# Altium PCB auton_26.PcbDoc
Units mil, origin at the board's own origin, x right, y up, seen from the top; angles counter-clockwise.
Board outline 4000 x 2000 mil, 2 copper layers (Top Layer, Bottom Layer); 26 components, 23 nets, 76 pads, 3 vias.
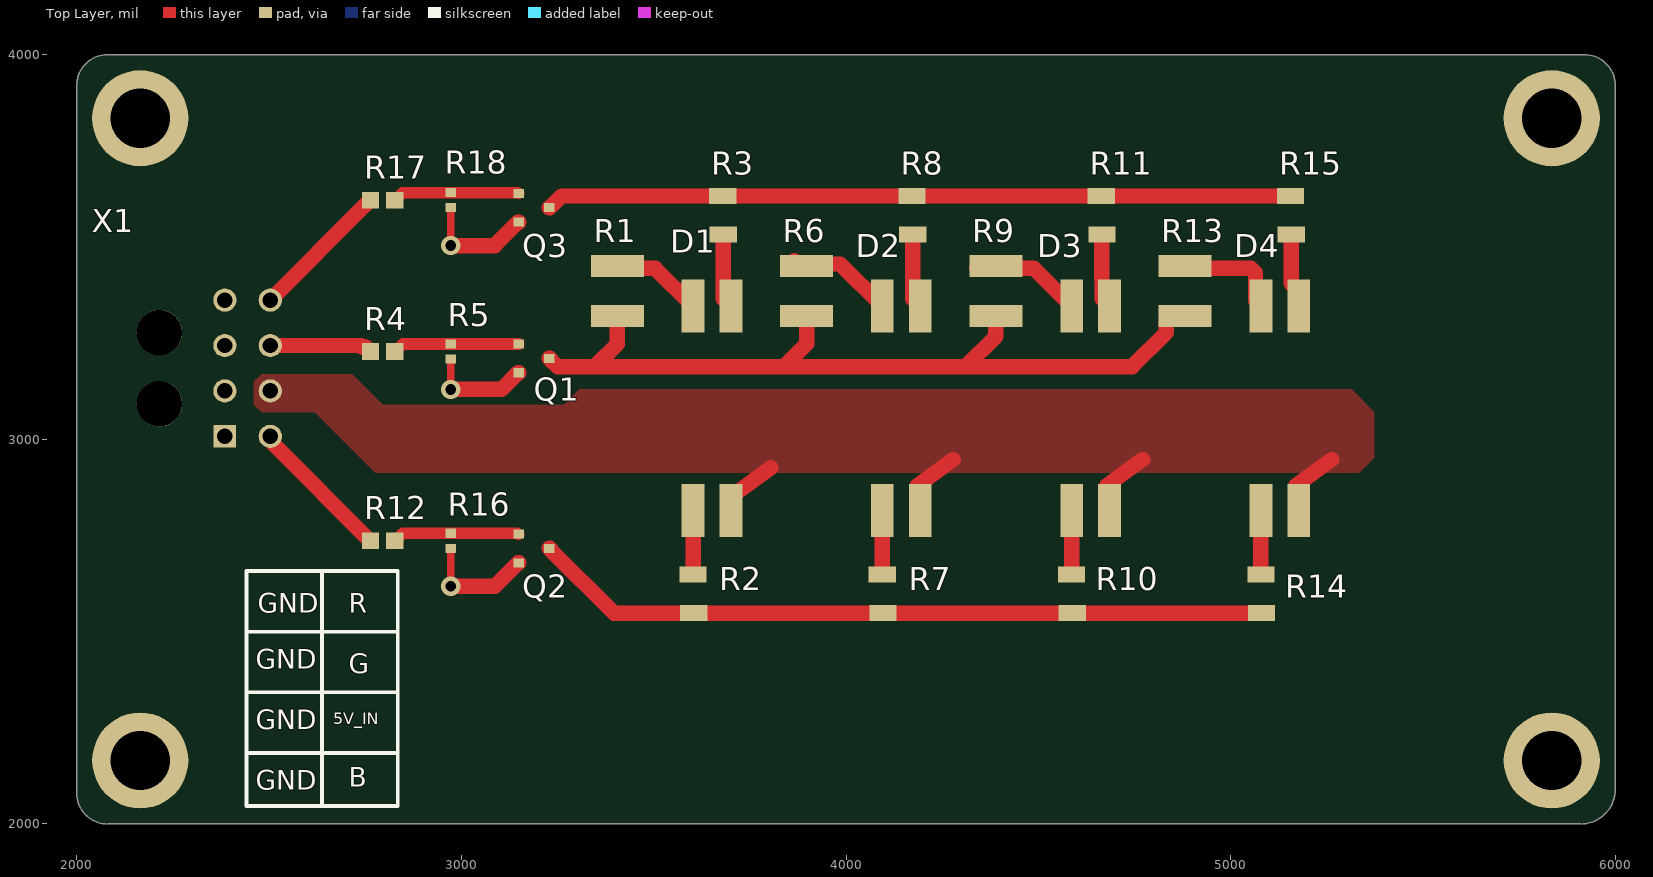
[diagram p0: Top Layer view]
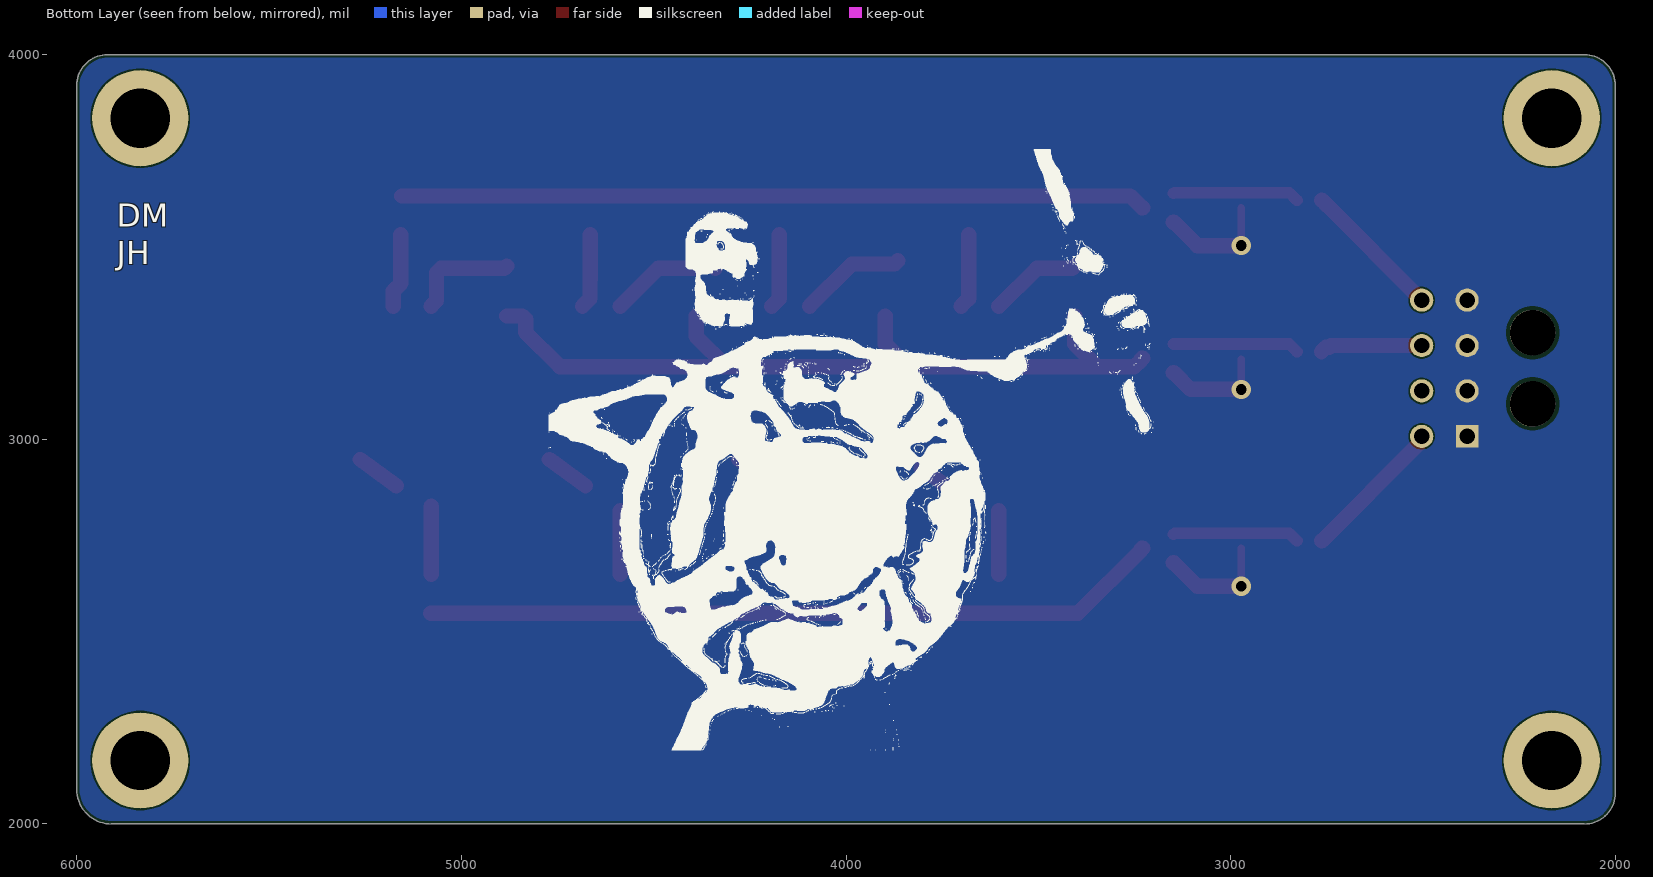
[diagram p1: Bottom Layer view, seen from below]
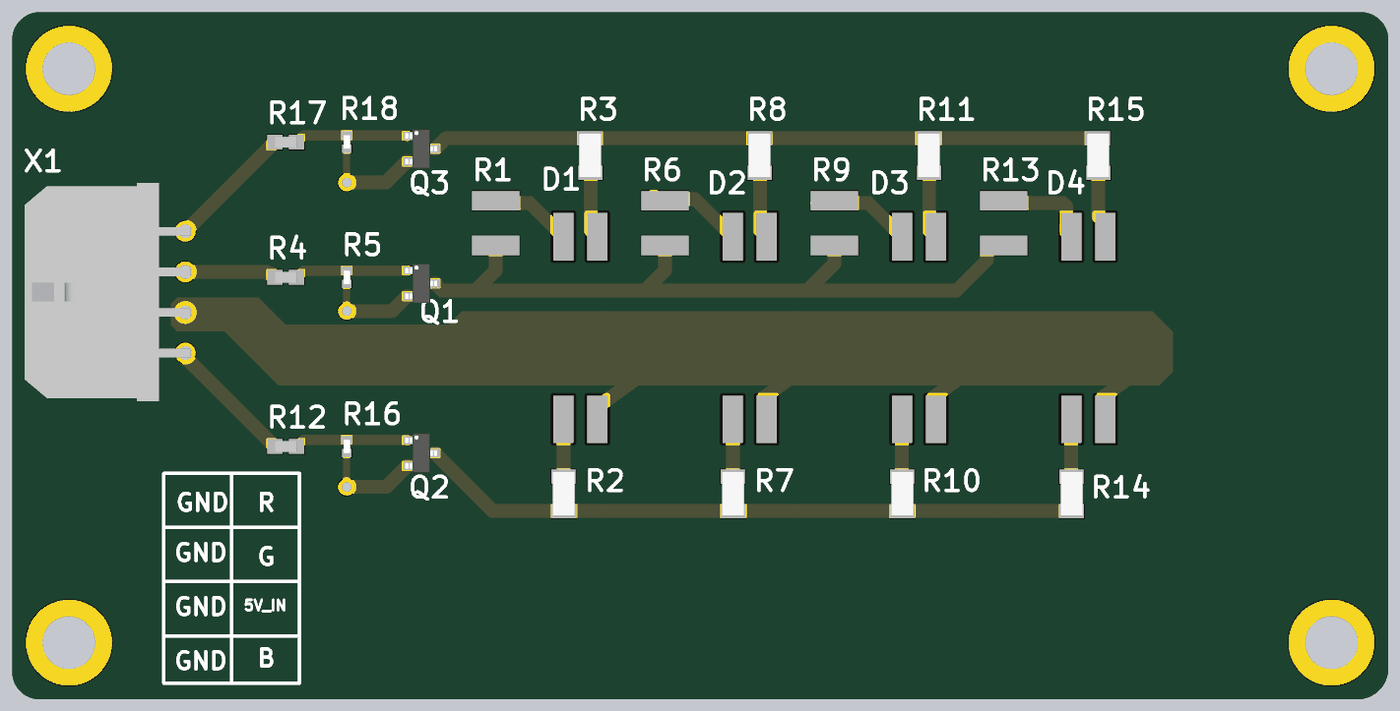
[diagram p2: 3D render of the assembled board from above, using the file's embedded part models]

## Layer stack, top to bottom
Top Solder: solder mask 0.4, Solder Resist, Dk 3.5
Top Layer: signal copper 1.4
Dielectric 1: dielectric 12.6, FR-4, Dk 4.8
Bottom Layer: signal copper 1.4
Bottom Solder: solder mask 0.4, Solder Resist, Dk 3.5

## Board outline
2000,2080.13 2000,3920 cw(c2080,3920) 2080,4000 5920,4000 cw(c5920,3920) 6000,3920 6000,2090 cw(c5910,2090) 5910,2000 2080.13,2000 cw(c2080.13,2080.13)

## Design rules (kind name [scope] priority, off if disabled: settings)
BoardOutlineClearance [All] p1: gap=7.87 ignorepadtopadclearanceinfootprint=FALSE
Clearance Clearance_1 [InNet('No Net') vs InNet('GND')] p1: gap=393.7 ignorepadtopadclearanceinfootprint=FALSE
Clearance "Stitching GND" [IsStitchingVia and InNet('GND') vs (IsVia and (Not IsStitchingVia)) Or IsPad] p2: gap=5 ignorepadtopadclearanceinfootprint=FALSE
Clearance [All] p3: gap=4 ignorepadtopadclearanceinfootprint=FALSE except(5: Arc-Via Track-Via SMDPad-Via THPad-Via Via-Via Via-Fill Via-Poly Via-Region Via-Text; 9.84: Arc-Hole Track-Hole SMDPad-Hole THPad-Hole Via-Hole Fill-Hole Poly-Hole Region-Hole Text-Hole)
ComponentClearance [All] p1: gap=4 collisioncheckmode=3 verticalgap=4 showdistances=TRUE
DiffPairsRouting [All] p1: maxlimit=4 minlimit=4 mostfreqgap=4 toplayer_minwidth=4 toplayer_maxwidth=71497.94 toplayer_prefwidth=4 bottomlayer_minwidth=4 bottomlayer_maxwidth=71497.94 bottomlayer_prefwidth=4 maxuncoupledlength=500
DiffPairsRouting USB [OnLayer('Top Layer') And InDifferentialPairClass('USB')] p2: maxlimit=5 minlimit=5 mostfreqgap=5 toplayer_minwidth=9.35 toplayer_maxwidth=9.35 toplayer_prefwidth=9.35 bottomlayer_minwidth=9.35 bottomlayer_maxwidth=9.35 bottomlayer_prefwidth=9.35 impedanceprofiledriven=TRUE impedanceprofileid={C8994B27-2D6B-4B4B-A1C4-DCAF0529D0FB} maxuncoupledlength=500
Height [All] p1: minheight=0 maxheight=71497.94 prefheight=500
HoleSize [All] p1: absolutevalues=TRUE maxlimit=248.03 minlimit=7.87 maxpercent=80.000 minpercent=20.000
HoleToHoleClearance [All] p1: gap=9.84 allowstackedmicrovias=FALSE
MinimumAnnularRing [All] p1: minimumring=3
MinimumSolderMaskSliver [All] p1: minsoldermaskwidth=0
PlaneClearance [All] p1: clearance=4
PlaneConnect PlaneConnectPowerPads [InPadClass('PowerPads')] p1: planeconnectstyle=Direct reliefexpansion=20 reliefentries=4 reliefconductorwidth=10 reliefairgap=10
PlaneConnect [All] p2: planeconnectstyle=Direct reliefexpansion=11.81 reliefentries=4 reliefconductorwidth=4 reliefairgap=4
PolygonConnect PolygonConnectPowerPads [All vs (InPadClass('PowerPads'))] p1: connectstyle=Direct reliefconductorwidth=10 reliefentries=4 polygonreliefangle="90 Angle" airgapwidth=10
PolygonConnect [All] p2: connectstyle=Direct reliefconductorwidth=4 reliefentries=4 polygonreliefangle="90 Angle" airgapwidth=4
RoutingVias [All] p1: holewidth=12.01 width=23.82 viastyle="Through Hole" minholewidth=11.81 minwidth=23.62 maxholewidth=15.94 maxwidth=27.76
SilkToSilkClearance [All] p1: silktosilkclearance=0
SilkToSolderMaskClearance [IsPad] p1: minsilkscreentomaskgap=4 clearancetoexposedcopper=TRUE
SolderMaskExpansion [All] p1: expansion=2.95 istentingtop=FALSE
SupplyNets "Schematic Supply Nets_3" [InNet('GND')] p1: voltage=0.000
SupplyNets "Schematic Supply Nets_1" [InNet('5V')] p2: voltage=0.000
SupplyNets "Schematic Supply Nets" [InNet('3V3')] p3: voltage=0.000
Width [All] p1: maxlimit=50 minlimit=4 preferedwidth=10 minimp=50.000000 maximp=50.000000 favimp=50.000000
20 further rules are at their usual default settings.

## Components (designator, comment, footprint, x,y, rotation, side; value= is the part's Value field where it differs from the comment)
D1 "FD-9RGB-Y2" "RGBLED PCB" 3602.36,3740.16 r270 top
D2 "FD-9RGB-Y2" "RGBLED PCB" 4094.49,3740.16 r270 top
D3 "FD-9RGB-Y2" "RGBLED PCB" 4586.61,3740.16 r270 top
D4 "FD-9RGB-Y2" "RGBLED PCB" 5078.74,3740.16 r270 top
Q1 "T2N7002AK,LM" IC-SOT23-3 3188.98,3210.63 r270 top
Q2 "T2N7002AK,LM" IC-SOT23-3 3188.98,2716.54 r270 top
Q3 "T2N7002AK,LM" IC-SOT23-3 3188.98,3602.36 r270 top
R1 "352116RFT" RES-2512 3405.51,3385.83 r270 top
R2 "CRCW120610R0FKEAHP" RES-1206 3602.36,2598.43 r270 top
R3 "CRCW120610R0FKEAHP" RES-1206 3681.1,3582.68 r90 top
R4 "RC0603FR-07100KL" RES-0603 2795.28,3228.35 r0 top
R5 "RC0402FR-0782K5L" RES-0402 2972.44,3228.35 r270 top
R6 "352116RFT" RES-2512 3897.64,3385.83 r270 top
R7 "CRCW120610R0FKEAHP" RES-1206 4094.49,2598.43 r270 top
R8 "CRCW120610R0FKEAHP" RES-1206 4173.23,3582.68 r90 top
R9 "352116RFT" RES-2512 4389.76,3385.83 r270 top
R10 "CRCW120610R0FKEAHP" RES-1206 4586.61,2598.43 r270 top
R11 "CRCW120610R0FKEAHP" RES-1206 4665.35,3582.68 r90 top
R12 "RC0603FR-07100KL" RES-0603 2795.28,2736.22 r0 top
R13 "352116RFT" RES-2512 4881.89,3385.83 r270 top
R14 "CRCW120610R0FKEAHP" RES-1206 5078.74,2598.43 r270 top
R15 "CRCW120610R0FKEAHP" RES-1206 5157.48,3582.68 r90 top
R16 "RC0402FR-0782K5L" RES-0402 2972.44,2736.22 r270 top
R17 "RC0603FR-07100KL" RES-0603 2795.28,3622.05 r0 top
R18 "RC0402FR-0782K5L" RES-0402 2972.44,3622.05 r270 top
X1 "Molex - Micro-Fit 3.0 Series connector,  3.00mm (0.118\") pitch header, 8 positions." 43045-0800 2215,3185 r270 top

## Footprints (in the part's own frame and the unit in brackets; to place one, negate y for a bottom-side part, rotate by r counter-clockwise, add the part's x,y. Pads: shape width x height; smd on the part's side, far side on the other; paste and mask are expansions set on the pad)
43045-0800 [mm]
  round 3 hole 3 unplated: 1(-2.35,0) 1(2.35,0)
  rect 1.482x1.482 / inner rect 1.524x1.524 / far side rect 1.482x1.482 hole 1.02: P$1(4.5,4.32)
  round 1.53 / inner round 1.524 / far side round 1.53 hole 1.02: P$2(1.5,4.32) P$3(-1.5,4.32) P$4(-4.5,4.32) P$5(4.5,7.32) P$6(1.5,7.32) P$7(-1.5,7.32) P$8(-4.5,7.32)
  body extent -8.07,-4.55 8.08,7.69, height 8.83
IC-SOT23-3 [mm]
  rect 0.6x0.7 smd: 1(-0.95,-1) 2(0.95,-1) 3(0,1)
  body extent -1.46,-1.18 1.46,1.19, height 1.12
RES-0402 [mm]
  rect 0.6x0.7 smd: 1(-0.5,0) 2(0.5,0)
  body extent -0.5,-0.25 0.5,0.25, height 0.3
RES-0603 [mm]
  rect 1.15x1.1 smd: 1(-0.8,0) 2(0.8,0)
  body extent -0.8,-0.4 0.8,0.4, height 0.43
RES-1206 [mm]
  rect 1.05x1.8 smd: 1(-1.275,0) 2(1.275,0.043)
  body extent -1.6,-0.77 1.6,0.82, height 0.55
RES-2512 [mm]
  rect 1.45x3.5 smd: 1(-1.65,0) 2(1.65,0)
"RGBLED PCB" [mm]
  rect 3.5x1.5 smd mask+0.2: 0(10,2.5) 1(10,0) 2(23.5,2.5) 3(23.5,0)

## Part data
D1 D2 D3 D4: library part "3W-9W RGB LED", "https://www.adafruit.com/product/2524#technical-details"
Q1 Q2 Q3: library part NMOS-200MA-0001, "MOSFET N-CH 60V 200MA SOT23", Continuous Current=200mA, Voltage=60V, ComponentLink1Description=Datasheet, ComponentLink1URL=https://toshiba.semicon-storage.com/info/T2N7002AK_datasheet_en_20150401.pdf?did=29712&prodName=T2N7002AK
R1 R6 R9 R13: library part RES-16-0001, "16 Ohms ±1% 2W Chip Resistor 2512 (6332 Metric) Automotive AEC-Q200, Moisture Resistant Thick Film", Package=None, Power=2W, Resistance=16R, Availability=Unavailable, Price=None
R2 R3 R7 R8 R10 R11 R14 R15: library part RES-10-0001, "10 Ohms ±1% 0.75W, 3/4W Chip Resistor 1206 (3216 Metric) Automotive AEC-Q200, Pulse Withstanding Thick Film", Package="3116 Vishay", Power=3/4W, Resistance=10R, Check_prices=https://www.snapeda.com/parts/CRCW120610R0FKEAHP/Vishay+Dale/view-part/?ref=eda, MF=Vishay, SnapEDA=https://www.snapeda.com/parts/CRCW120610R0FKEAHP/Vishay+Dale/view-part/?ref=snap
R4 R12 R17: library part RES-100k-0001, "RES SMD 100K OHM 1% 1/10W 0603", Power=100mW, Resistance=100k, Tolerance=1%, ComponentLink1Description=Datasheet, ComponentLink1URL=https://www.yageo.com/upload/media/product/products/datasheet/rchip/PYu-RC_Group_51_RoHS_L_12.pdf, Size=0603
R5 R16 R18: library part RES-82.5k-0001, "82.5 kOhms ±1% 0.063W, 1/16W Chip Resistor 0402 (1005 Metric) Moisture Resistant Thick Film", Power=1/16W, Resistance=82.5k, Tolerance=1%, ComponentLink1Description=Datasheet, ComponentLink1URL=https://www.lcsc.com/datasheet/lcsc_datasheet_2304140030_YAGEO-RC0603FR-0712KL_C114659.pdf, Size=0603
X1: library part HEADER_POS8_?43045-0800, Package=43045-0800, DeviceName=43045-0800, DeviceSetName=HEADER_POS8_?, GateName_1=G$1, LibraryName=con-molex-micro-fit-3_0_2, SymbolName_1=HEADER_POS8

## Free pads (board coordinates)
  round 250 hole 153.54: ""(2165,2165) ""(2165,3835) ""(5835,2165) ""(5835,3835)
  round 250 hole 150: ""(2165,3835)

## Via types
v1: diameter 50, hole 28, Top Layer to Bottom Layer, 3 vias

## Nets (pads, with @x,y where several pads share a name; then routed paths per layer and width w, separated by ;. In a path a pad name is that pad's centre, name@x,y a point inside that pad or via, vN(x,y) a via of type N, cw(c..) or ccw(c..) an arc to the next point about the centre after c; other vN are vias at no path point)
5V_IN: D1.2 D2.2 D3.2 D4.2 X1.P$6 | length 509.1
  Top Layer w40: D1.2 3710.32,2857.48 3804.25,2926.18 ; D2.2@4185.31,2879.04 4279.25,2947.73 ; D3.2@4677.44,2879.04 4771.38,2947.73 ; D4.2@5169.57,2879.04 5263.5,2947.73
B-: Q3.3 R3.2 R8.2 R11.2 R15.2 | length 1940.1
  Top Layer w40: Q3.3 3230.32,3602.36 3260.83,3632.87 R8.2 R11.2 R15.2
B_MCU: R17.1 X1.P$8 | length 368.7
  Top Layer w40: X1.P$8 2751.14,3610.12 2751.14,3610.39 R17.1@2762.8,3622.05 ; R17.1@2763.07,3622.05 R17.1@2762.8,3622.05 ; R17.1 R17.1@2762.8,3622.05
G-: Q2.3 R2.2 R7.2 R10.2 R14.2 | length 1923
  Top Layer w40: Q2.3 3230.32,2716.54 3232.13,2714.72 3232.13,2712.76 3396.65,2548.23 R2.2 R7.2 R10.2 R14.2
G_MCU: R12.1 X1.P$5 | length 379.1
  Top Layer w40: X1.P$5 2510.89,3000.13 2510.89,2988.13 R12.1@2762.8,2736.22
GND: Q1.2 Q2.2 Q3.2 R5.2 R16.2 R18.2 X1.P$1 X1.P$2 X1.P$3 X1.P$4 | length 880.1
  Top Layer w20: v1(2972.44,2618.11) R16.2 ; v1(2972.44,3129.92) R5.2 ; v1(2972.44,3503.94) R18.2
  Top Layer w40: X1.P$1@2381.89,3004.64 X1.P$1 ; v1(2972.44,2618.11) 3086.61,2618.11 3147.64,2679.13 Q2.2 ; v1(2972.44,3129.92) 3104.33,3129.92 3147.64,3173.23 Q1.2 ; v1(2972.44,3503.94) 3086.61,3503.94 3147.64,3564.96 Q3.2
NetD1_0: D1.0 R3.1 | length 194.2
  Top Layer w40: R3.1 3681.1,3417.07 3681.26,3416.91 3681.26,3365.98 D1.0
NetD1_1: D1.1 R1.1 | length 240.1
  Top Layer w40: R1.1 3411.42,3444.88 3503.94,3444.88 D1.1
NetD1_2: D1.3 R2.1 | length 166.3
  Top Layer w40: R2.1 D1.3
NetD2_0: D2.0 R8.1 | length 194.2
  Top Layer w40: R8.1 4173.23,3417.07 4173.39,3416.91 4173.39,3365.98 D2.0
NetD2_1: D2.1 R6.1 | length 278.3
  Top Layer w40: R6.1@3865.11,3464.57 3873.55,3456.13 3984.82,3456.13 D2.1
NetD2_2: D2.3 R7.1 | length 166.3
  Top Layer w40: R7.1@4094.49,2653.05 D2.3@4094.49,2819.39
NetD3_0: D3.0 R11.1 | length 194.2
  Top Layer w40: R11.1 4665.35,3417.07 4665.51,3416.91 4665.51,3365.98 D3.0
NetD3_1: D3.1 R9.1 | length 289.8
  Top Layer w40: R9.1@4340.04,3444.88 4345.95,3450.79 R9.1 ; R9.1@4389.76,3444.88 4488.19,3444.88 D3.1
NetD3_2: D3.3 R10.1 | length 166.3
  Top Layer w40: R10.1 D3.3
NetD4_0: D4.0 R15.1 | length 194.2
  Top Layer w40: R15.1 5157.48,3405.51 5177.17,3385.83 D4.0
NetD4_1: D4.1 R13.1 | length 282.6
  Top Layer w40: R13.1 4887.8,3444.88 5052.88,3444.88 5064.6,3433.17 5064.6,3360.6 D4.1
NetD4_2: D4.3 R14.1 | length 177.3
  Top Layer w40: R14.1 D4.3@5078.74,2825.92
NetQ1_1: Q1.1 R4.2 R5.1 | length 331
  Top Layer w30: R4.2 2827.76,3228.35 2847.44,3248.03 R5.1 Q1.1
NetQ2_1: Q2.1 R12.2 R16.1 | length 329.8
  Top Layer w30: R12.2 2827.76,2736.22 2847.44,2755.91 R16.1@2970.47,2755.91 ; R16.1 3145.67,2755.91 3147.64,2753.94 Q2.1
NetQ3_1: Q3.1 R17.2 R18.1 | length 331.8
  Top Layer w30: R17.2 2827.76,3622.05 2847.44,3641.73 3145.67,3641.73 3147.64,3639.76 Q3.1
R-: Q1.3 R1.2 R6.2 R9.2 R13.2 | length 2215.7
  Top Layer w40: Q1.3 3230.32,3210.63 3232.13,3208.82 3232.13,3206.85 3250,3188.98 3346.46,3188.98 ; R1.2 3405.51,3248.03 3346.46,3188.98 ; R6.2 3897.64,3248.03 3838.58,3188.98 ; R9.2 4389.76,3267.72 4311.02,3188.98 ; R13.2 4841.54,3320.87 4832.99,3312.32 4832.99,3277.87 4744.09,3188.98 4311.02,3188.98 ; 3346.46,3188.98 3838.58,3188.98 ; 3838.58,3188.98 4311.02,3188.98
R_MCU: R4.1 X1.P$7 | length 267.1
  Top Layer w40: X1.P$7 2739.43,3244.06 2743.49,3240 2752.13,3240 R4.1
pads on no net: X1.1

## Polygon pours and split planes (outlines as drawn)
GND on Bottom Layer "GND_L02_P000" (solid, pour order 0): 1929.13,4094.49 6456.69,4094.49 6456.69,2047.24 6279.53,1870.08 1889.76,1870.08
5V_IN on Top Layer "NONET_L-01_P-001" (solid, pour order 4): 2480.31,3169.29 2460.63,3149.61 2460.63,3090.55 2480.32,3070.87 2618.11,3070.87 2775.59,2913.39 5334.65,2913.39 5374.02,2952.76 5374.02,3070.87 5314.96,3129.92 3307.09,3129.92 3267.72,3090.55 2795.28,3090.55 2716.54,3169.29 2480.32,3169.29

## Silkscreen, mask and mechanical layers (free items; w line width, h text height)
Top Overlay:
  lines w10: 2440.95,2185.04 2834.65,2185.04 ; 2440.95,2342.52 2834.65,2342.52 ; 2440.95,2500 2834.65,2500 ; 2637.8,2047.24 2637.8,2657.48 ; 2440.95,2047.24 2834.65,2047.24 2834.65,2657.48 2440.95,2657.48 2440.95,2047.24
  text "GND" at 2470.63,2549.37 h50
  text "R" at 2706.85,2549.37 h50
  text "GND" at 2465.63,2403.48 h50
  text "G" at 2706.85,2391.89 h50
  text "5V_IN" at 2667.48,2259.09 h30
  text "GND" at 2465.63,2246 h50
  text "B" at 2706.85,2096.61 h50
  text "GND" at 2465.63,2088.52 h50
Bottom Overlay:
  drawing of 3927 lines, arcs and shapes, not listed
  text "DM" at 5895.51,3553.31 h60
  text "JH" at 5895.51,3454.88 h60
Mechanical 1:
  lines w10: 2080,4000 ccw(c2080,3920) 2000,3920 2000,2080.13 ccw(c2080.13,2080.13) 2080.13,2000 5910,2000 ccw(c5910,2090) 6000,2090 ; 2083.39,4000.94 5923.39,4000.94 ; 5920,4000 cw(c5920,3920) 6000,3920 ; 6000,2095 6000,3925